# EAGLE board mc (EAGLE 9.6.2)
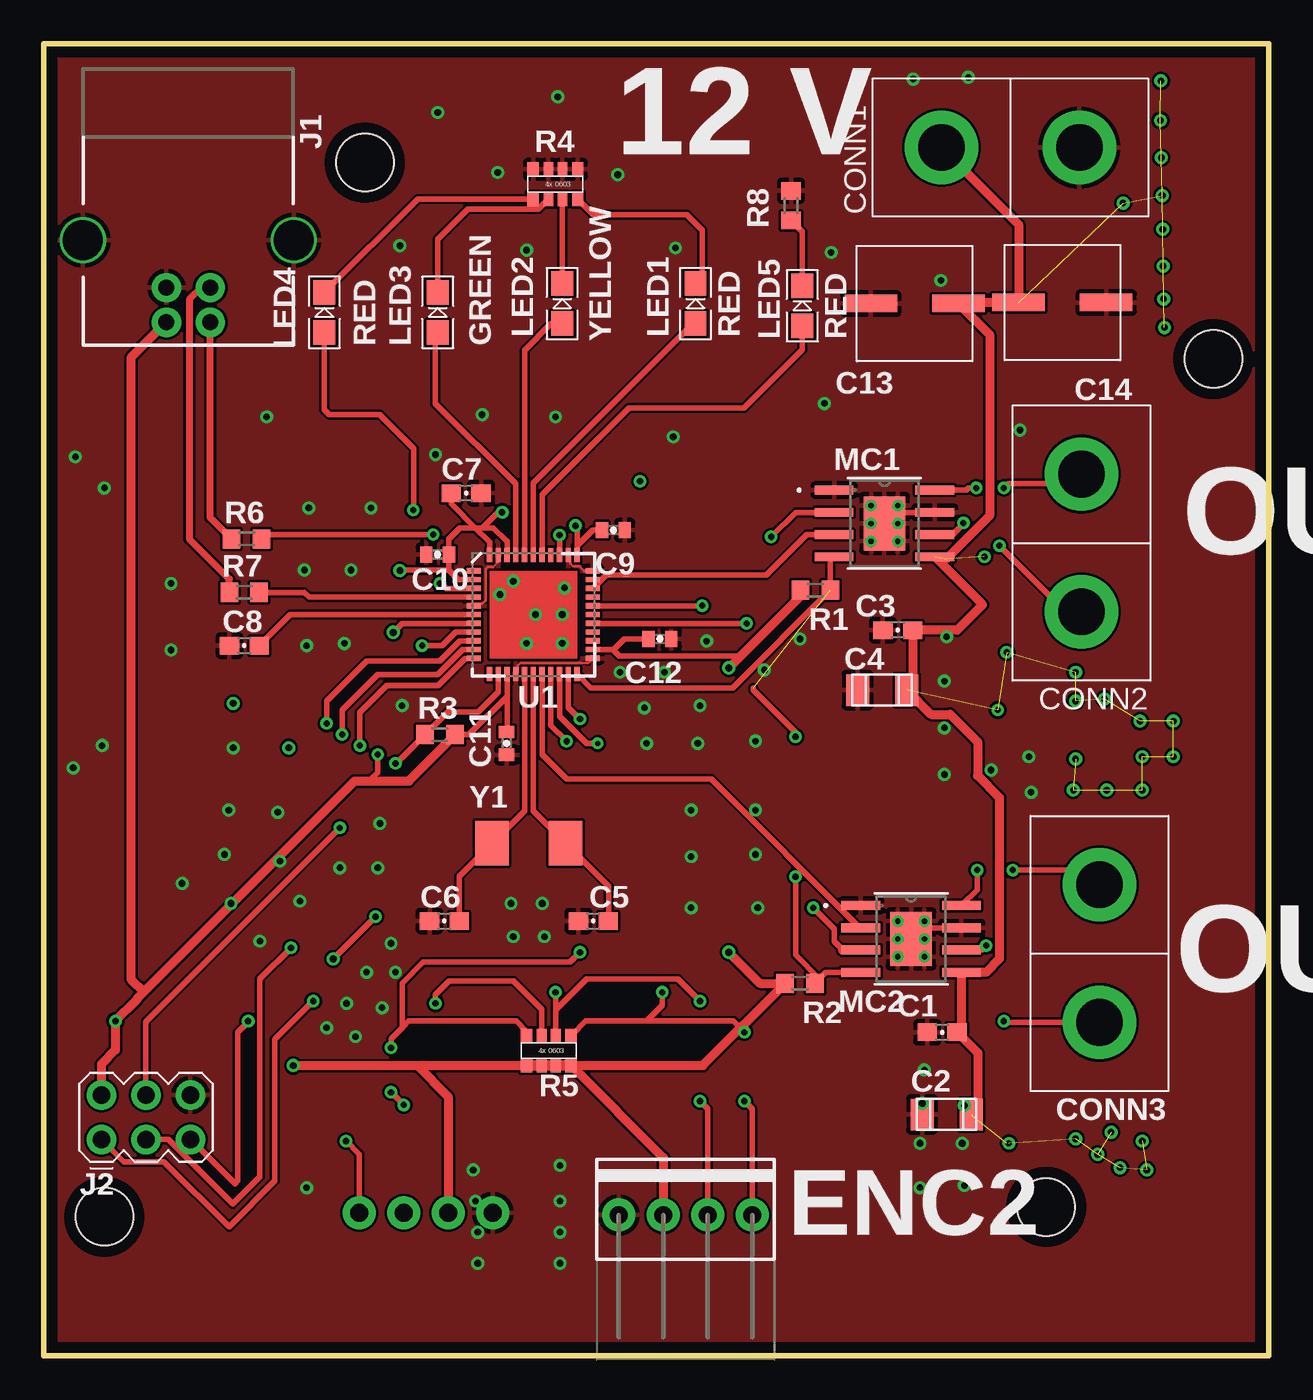
[diagram p0: board, top side]
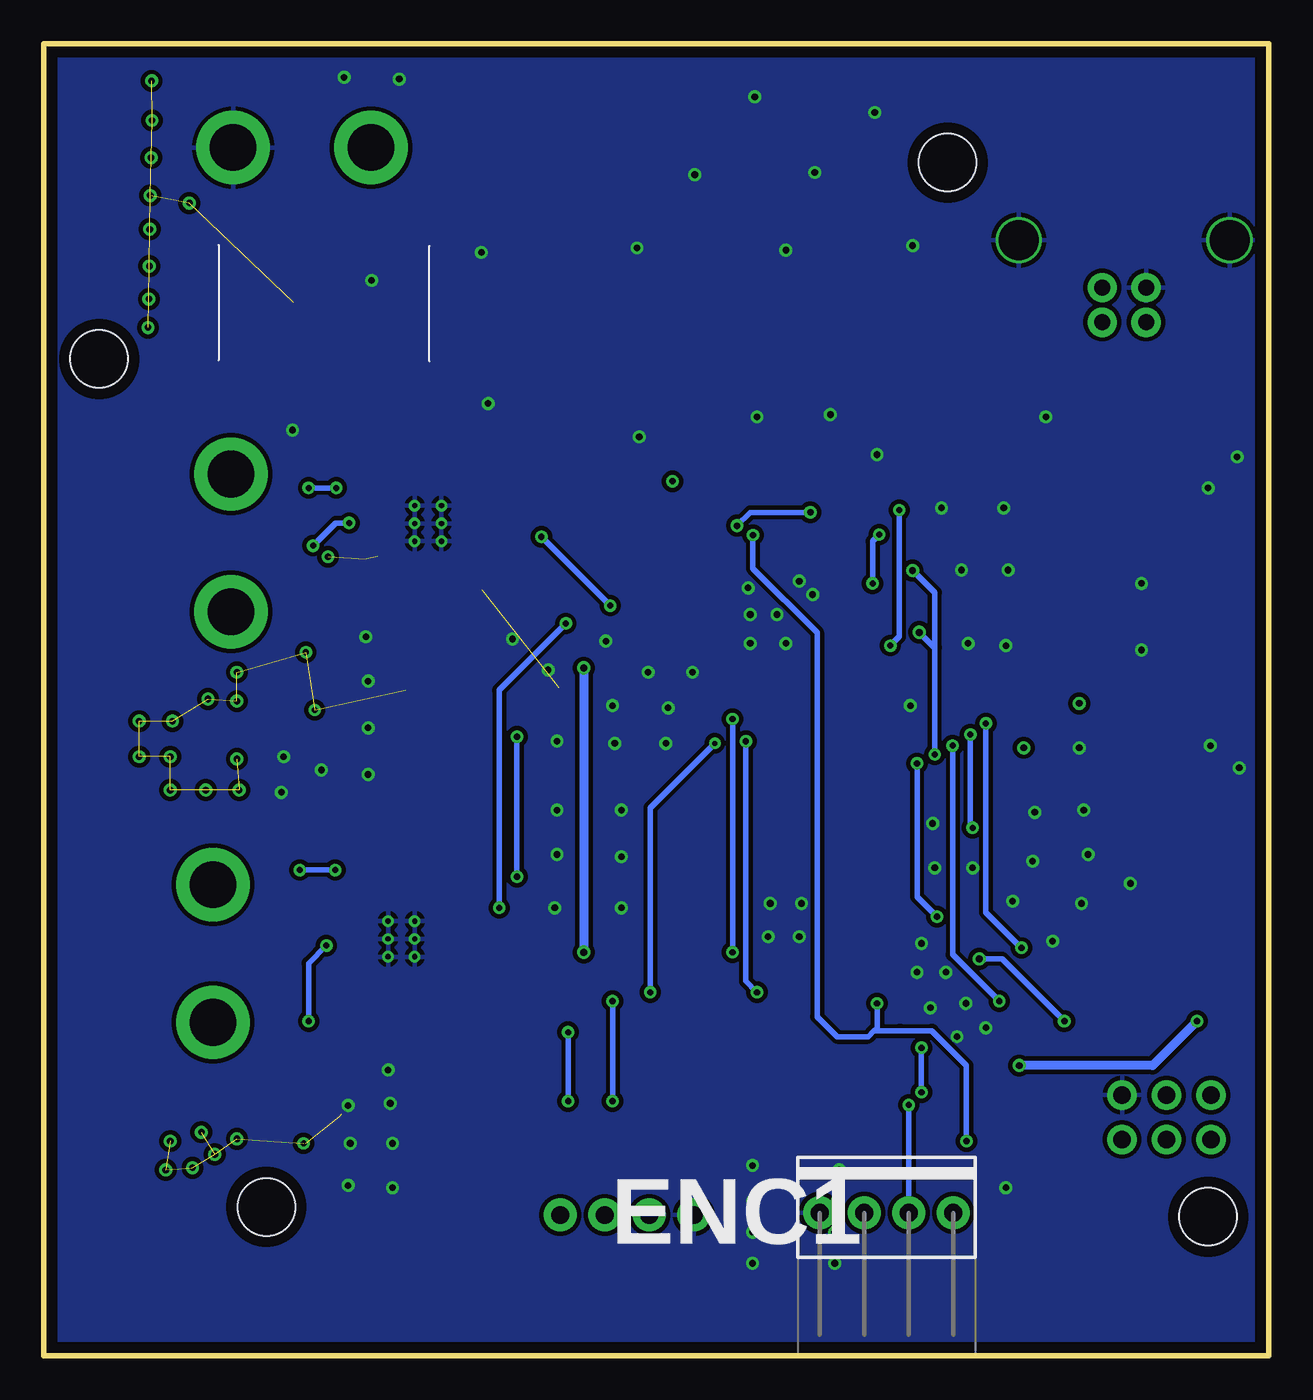
[diagram p1: board, bottom side, seen from below]

Size 70 x 75 mm. Coordinates in mm from the lower left corner, seen from the top.
Outline: 0,0 70,0 70,75 0,75 0,0
Copper layers (1*16): Top 2mil / dielectric 9mil / Bottom 2mil
Design rules "pie_jlc": minimum track width 6mil, minimum drill 0.199896875mm, track to track 6mil, track to pad 6mil, pad to pad 6mil, via to via 6mil, smd to smd 6mil, copper to edge 25mil, drill to drill 7mil, minimum pad ring 7mil, minimum via ring 7mil, stop-mask expansion 3mil, vias tented up to drill 21mil, thermal gap 10mil

## Footprints (pad centres in the part's own frame; a part is rotated, then mirrored left to right if it is on the bottom)
0603-CAP = smd 1.1 x 1: 1 -0.85,0; 2 0.85,0
1206 = smd 1.306 x 1.8: 1 -1.403,0; 2 1.403,0
0402-CAP = smd 0.7 x 0.9: 1 -0.65,0; 2 0.65,0
LELON_CAP = smd 3 x 1: P$1 -2.5,0; P$2 2.5,0
ANDERSON_VERTICAL = drill 2.667 pad 4.191: PIN1 0,-3.937; PIN2 0,3.937
1X04-MTA = drill 1.016 pad 1.88: 1 -3.81,0; 2 -1.27,0; 3 1.27,0; 4 3.81,0
USB-B-PTH = drill 0.914 pad 1.676: D+ 4,1.25; D- 5.981,1.25; GND 4,-1.25; VBUS 5.981,-1.25 | drill 2.286: SHLD1 1.282,-6.02; SHLD2 1.282,6.02
MA03-2 = drill 1 pad 1.676: 1 -2.54,-1.27; 2 -2.54,1.27; 3 0,-1.27; 4 0,1.27; 5 2.54,-1.27; 6 2.54,1.27
LED-0805 = smd 1.397 x 1.245: A -1.143,0; C 1.143,0
DDA0008H_N_TEX = smd 2.21 x 0.508: 1 -2.875,1.905; 2 -2.875,0.635; 3 -2.875,-0.635; 4 -2.875,-1.905; 5 2.875,-1.905; 6 2.875,-0.635; 7 2.875,0.635; 8 2.875,1.905 | smd 2.388 x 3.099: 9 0,0 | drill 0.3: P$1 -0.762,1.016; P$2 0.762,1.016; P$3 -0.762,0; P$4 0.762,0; P$5 -0.762,-1.016; P$6 0.762,-1.016
R0603 = smd 1 x 1.1: 1 -0.85,0; 2 0.85,0
4X-0603 = smd 0.65 x 0.8: 1 0,-0.05; 4 2.55,-0.05; 5 2.55,1.65; 8 0,1.65 | smd 0.55 x 0.8: 2 0.875,-0.05; 3 1.675,-0.05; 6 1.675,1.65; 7 0.875,1.65
QFN-44 = smd 0.8 x 0.3: 1 -3.4,2.5; 2 -3.4,2; 3 -3.4,1.5; 4 -3.4,1; 5 -3.4,0.5; 6 -3.4,0; 7 -3.4,-0.5; 8 -3.4,-1; 9 -3.4,-1.5; 10 -3.4,-2; 11 -3.4,-2.5; 23 3.4,-2.5; 24 3.4,-2; 25 3.4,-1.5; 26 3.4,-1; 27 3.4,-0.5; 28 3.4,0; 29 3.4,0.5; 30 3.4,1; 31 3.4,1.5; 32 3.4,2; 33 3.4,2.5 | smd 0.3 x 0.8: 12 -2.5,-3.4; 13 -2,-3.4; 14 -1.5,-3.4; 15 -1,-3.4; 16 -0.5,-3.4; 17 0,-3.4; 18 0.5,-3.4; 19 1,-3.4; 20 1.5,-3.4; 21 2,-3.4; 22 2.5,-3.4; 34 2.5,3.4; 35 2,3.4; 36 1.5,3.4; 37 1,3.4; 38 0.5,3.4; 39 0,3.4; 40 -0.5,3.4; 41 -1,3.4; 42 -1.5,3.4; 43 -2,3.4; 44 -2.5,3.4
STAND-OFF = hole 3.302: 0,0
CRYSTAL-SMD-5.0X3.2-2PIN = smd 1.905 x 2.54: P$1 -2.095,0; P$2 2.095,0

## Placement (x,y rotation side)
C1  0.1 µF  [0603-CAP]  51.34,18.5 180 top
C2  47 µF  [1206]  51.59,13.8 180 top
C3  0.1 µF  [0603-CAP]  48.8,41.48 180 top
C4  47 µF  [1206]  47.91,38.05 180 top
C5  18pF  [0603-CAP]  31.4,24.84 0 top
C6  18pF  [0603-CAP]  22.89,24.84 0 top
C7  1 uF  [0603-CAP]  24.14,49.31 180 top
C8  1uF  [0603-CAP]  11.46,40.59 0 top
C9  0.1 uF  [0402-CAP]  32.55,47.2 180 top
C10  0.1 uF  [0402-CAP]  22.51,45.8 0 top
C11  0.1 uF  [0402-CAP]  26.45,35.01 90 top
C12  0.1 uF  [0402-CAP]  35.21,40.97 180 top
C13  LELON_ELECTROLYTIC_CAP  [LELON_CAP]  49.77,60.15 180 top
C14  LELON_ELECTROLYTIC_CAP  [LELON_CAP]  58.21,60.2 0 top
CONN1  ANDERSONVERTICAL  [ANDERSON_VERTICAL]  55.24,69.06 90 top
CONN2  ANDERSONVERTICAL  [ANDERSON_VERTICAL]  59.29,46.46 180 top
CONN3  ANDERSONVERTICAL  [ANDERSON_VERTICAL]  60.32,22.99 180 top
ENC1  [1X04-MTA]  21.84,8.18 0 bottom
ENC2  [1X04-MTA]  36.67,8.05 0 top
J1  USB_B_PTH  [USB-B-PTH]  8.26,65.06 270 top
J2  AVR_SPI_PRG_6MA03-2  [MA03-2]  5.84,13.64 0 top
LED1  RED  [LED-0805]  37.24,60.15 90 top
LED2  YELLOW  [LED-0805]  29.62,60.15 90 top
LED3  GREEN  [LED-0805]  22.51,59.64 90 top
LED4  RED  [LED-0805]  16.04,59.64 90 top
LED5  RED  [LED-0805]  43.34,60.02 90 top
MC1  DRV8872DDAR  [DDA0008H_N_TEX]  48.04,47.58 0 top
MC2  DRV8872DDAR  [DDA0008H_N_TEX]  49.56,23.83 0 top
R1  10k  [R0603]  44.1,43.77 0 top
R2  10k  [R0603]  43.21,21.29 0 top
R3  10k  [R0603]  22.64,35.51 180 top
R4  330  [4X-0603]  30.51,67.77 180 top
R5  10k  [4X-0603]  30.13,18.24 180 top
R6  22  [R0603]  11.59,46.69 0 top
R7  22  [R0603]  11.46,43.64 0 top
R8  330  [R0603]  42.7,65.74 90 top
U1  32U4  [QFN-44]  27.97,42.37 0 top
U$1  [STAND-OFF]  3.46,7.95 0 top
U$2  [STAND-OFF]  57.28,8.51 0 top
U$3  [STAND-OFF]  66.83,56.98 0 top
U$4  [STAND-OFF]  18.36,68.2 0 bottom
U$5  [PIE-LOGO]  177.19,22.02 0 top  (outside the outline)
Y1  [CRYSTAL-SMD-5.0X3.2-2PIN]  27.72,29.29 0 top

## Library data of the parts
C1 C3 C5-C12 = pie; PIE-INT-REF-NUM: CAPACITOR-GENERIC
C2 C4 C13 C14 R4 R5 U$1-U$5 Y1 = pie
CONN1-CONN3 = pie; PIE-INT-REF-NUM: Anderson
ENC1 ENC2 = pie; PIE-INT-REF-NUM: MTA
J1 = pie; PROD_ID: CONN-08278; SF_ID: PRT-00139
J2 = pie; PIE-INT-REF-NUM: BULK-STOCK
LED1-LED5 = pie; PIE-INT-REF-NUM: LED
MC1 MC2 = pie; BUILT_BY: Texas_Instrument_Team; MANUFACTURER_PART_NUMBER: DRV8872DDAR; SOURCELIBRARY: TI_2019-01-17; VENDOR: Texas Instruments
R1-R3 R6-R8 = pie; DESCRIPTION: RESISTOR, American symbol; DISTRIBUTOR: DigiKey; MANUFACTURER: Rohm Semiconductor; NOTES: Cut Tape; PACKAGE: R0603
U1 = pie; PROD_ID: IC-10828

## Nets
A1: ENC1.3 R5.4 U1.21
A2: ENC1.4 R5.3 U1.36
AIN1: MC1.3 U1.31
AIN2: MC1.2 U1.29
AOUT1: CONN2.PIN2 MC1.6
AOUT2: CONN2.PIN1 MC1.8
B1: ENC2.3 R5.2 U1.19
B2: ENC2.4 R5.1 U1.20
BIN1: MC2.3 U1.27
BIN2: MC2.2 U1.18
BOUT1: CONN3.PIN2 MC2.6
BOUT2: CONN3.PIN1 MC2.8
D+: J1.D+ R7.1
D-: J1.D- R6.1
FAULT_N: MC1.4 MC2.4 R1.2 R2.2 U1.22
GND: C1.2 C2.2 C3.2 C4.2 C5.1 C6.1 C7.1 C8.1 C9.1 C10.1 C11.1 C12.1 C13.P$2 C14.P$2 CONN1.PIN1 ENC1.1 ENC2.1 J1.GND J1.SHLD1 J1.SHLD2 J2.6 MC1.1 MC1.7 MC1.9 MC1.P$1 MC1.P$2 MC1.P$3 MC1.P$4 MC1.P$5 MC1.P$6 MC2.1 MC2.7 MC2.9 MC2.P$1 MC2.P$2 MC2.P$3 MC2.P$4 MC2.P$5 MC2.P$6 R4.1 R4.2 R4.3 R4.4 R8.2 U1.5 U1.15 U1.23 U1.33 U1.35 U1.43
HEARTBEAT: LED5.A U1.38
LED1: LED1.A U1.39
LED2: LED2.A U1.40
LED3: LED3.A U1.41
LR1: LED1.C R4.8
LR2: LED2.C R4.7
LR3: LED3.C R4.6
LR4: LED4.C R4.5
N$1: C8.2 U1.6
N$3: C5.2 U1.17 Y1.P$2
N$6: R6.2 U1.3
N$9: R7.2 U1.4
N$10: LED5.C R8.1
N$13: C6.2 U1.16 Y1.P$1
RST: J2.5 R3.2 U1.13
RXLED: LED4.A U1.8
SCLK: J2.3 U1.9
SDATI: J2.4 U1.10
SDATO: J2.1 U1.11
VCC: C7.2 C9.2 C10.2 C11.2 C12.2 ENC1.2 ENC2.2 J1.VBUS J2.2 R1.1 R2.1 R3.1 R5.5 R5.6 R5.7 R5.8 U1.2 U1.7 U1.14 U1.24 U1.34 U1.42 U1.44
VM: C1.1 C2.1 C3.1 C4.1 C13.P$1 C14.P$1 CONN1.PIN2 MC1.5 MC2.5

## Tracks (layer width: path | path; a pad name or v marks a point on that pad's centre or on a via)
A1  (via drill 0.35, 0.35 pad 0.33)
  Top 0.305: R5.4 27.58,18.55 27,19.13 20.86,19.13 20.48,18.75 | 20.48,18.75 19.84,18.11 v19.84,17.61 | v19.84,15.07 v20.57,14.34 | U1.21 29.98,37.06 v30.64,36.4 | 20.48,18.75 20.48,21.29 21.7,22.51 30.08,22.51 v30.64,23.07
  Bottom 0.305: v19.84,17.61 v19.84,15.07 | v20.57,14.34 ENC1.3 | v30.64,36.4 v30.64,23.07
A2  (via drill 0.35, 0.35 pad 0.33)
  Top 0.305: R5.3 28.46,19.79 26.83,21.42 23.17,21.42 22.39,20.63 v22.39,20.15 | U1.36 v29.47,46.92 | v17.27,12.27 18.03,11.51 ENC1.4
  Bottom 0.152: 21.08,18.57
  Bottom 0.305: v22.39,20.15 22.39,18.75 22.56,18.57 | v29.47,46.92 29.47,45.01 25.81,41.35 25.81,19.38 24.67,18.24 22.89,18.24 22.56,18.57 | 22.56,18.57 21.08,18.57 19.26,18.57 17.27,16.59 v17.27,12.27
AIN1
  Top 0.305: U1.31 32.13,44.63 41.28,44.63 43.59,46.94 MC1.3
AIN2  (via drill 0.35 pad 0.33)
  Top 0.305: U1.29 v37.62,42.87 v37.62,42.88 | MC1.2 42.96,48.21 v41.56,46.82
  Bottom 0.305: v37.62,42.88 v41.56,46.82
AOUT1  (via drill 0.35)
  Top 0.305: MC1.6 51.94,46.94 52.58,47.58 v52.55,47.61 | v54.61,46.31 58.4,42.52 CONN2.PIN2
  Bottom 0.305: v52.55,47.61 53.31,47.61 v54.61,46.31
AOUT2  (via drill 0.35)
  Top 0.305: MC1.8 52.7,49.48 52.83,49.61 v53.28,49.61 | v54.86,49.61 55.12,49.86 58.93,49.86 59.29,50.23 CONN2.PIN1
  Bottom 0.305: v53.28,49.61 v54.86,49.61
B1  (via drill 0.35 pad 0.33)
  Top 0.305: R5.2 29.26,19.78 | v37.5,20.27 36.23,21.54 31.02,21.54 29.26,19.78 | v37.5,14.56 37.94,14.12 ENC2.3 | U1.19 28.97,36.04 v29.88,35.13 | 29.26,19.78 29.24,19.79 v29.24,20.78
  Bottom 0.305: v37.5,20.27 v37.5,14.56 | v29.88,35.13 29.88,21.42 v29.24,20.78
B2  (via drill 0.3 pad 0.33, 0.35 pad 0.33)
  Top 0.305: R5.1 30.97,19.13 34.45,19.13 | v40.04,18.5 39.4,19.13 34.45,19.13 | v40.04,14.56 40.48,14.12 ENC2.4 | 34.45,19.13 35.34,20.02 v35.34,20.78 | U1.20 29.47,36.55 31.02,35.01 v31.66,35.01
  Bottom 0.305: v40.04,18.5 v40.04,14.56 | v35.34,20.78 35.34,31.32 v31.66,35.01
BIN1  (via drill 0.35 pad 0.33)
  Top 0.305: U1.27 40.16,41.87 v40.16,41.86 | MC2.3 46.23,23.19 46.18,23.19 | v43.98,25.61 45.18,24.41 45.18,23.67 45.65,23.19
  Top 0.508: 45.65,23.19 46.23,23.19
  Bottom 0.305: v40.16,41.86 43.98,38.05 v43.98,25.61
BIN2
  Top 0.305: U1.18 28.47,34.38 29.88,32.97 38.13,32.97 46.64,24.46 MC2.2
BOUT1  (via drill 0.35)
  Top 0.305: MC2.6 53.59,23.19 v53.85,23.45 | v54.86,19.13 54.94,19.06 CONN3.PIN2
  Bottom 0.305: v53.85,23.45 54.86,22.43 v54.86,19.13
BOUT2  (via drill 0.35)
  Top 0.305: MC2.8 53.34,26.64 v53.34,27.77 | v55.37,27.77 59.49,27.77 CONN3.PIN1
  Bottom 0.305: v53.34,27.77 v55.37,27.77
D+
  Top 0.406: J1.D+ 9,61.06 8.33,60.39 8.33,46.69 10.61,44.4 R7.1
D-
  Top 0.406: R6.1 9.51,47.92 J1.D-
FAULT_N  (via drill 0.35 pad 0.33)  (1 unrouted)
  Top 0.305: U1.22 31.26,38.18 39.36,38.18 R1.2 44.95,45.46 MC1.4 | R2.2 44.32,21.55 | 44.32,21.55 44.7,21.92 MC2.4 46.13,21.92 | 40.55,38.18 40.55,38.05 42.96,35.64 v42.96,35.39 | 44.32,21.55 42.96,22.91 v42.96,27.38
  Bottom 0.305: v42.96,35.39 v42.96,27.38
GND  (via drill 0.38 pad 0.33)
  Top 0.152: U1.33 30.87,44.87 30.6,45.14 30.23,45.14 30.09,45.28 30.09,45.65 U1.35 | U1.5 24.69,42.99 25.07,42.99 25.24,43.17 25.24,44.97 25.38,45.1 25.68,45.1 25.97,45.4 U1.43 | U1.23 31.1,39.6 27.23,39.6 27.09,39.46 27.09,39.09 U1.15
  Top 0.305: MC1.9 48.67,48.21 MC1.7 | MC2.9 50.2,24.46 MC2.7
  other vias: 52.61,14.3 52.48,12.14 52.61,9.73 50.07,9.61 50.07,12.14 50.2,14.43 50.33,16.34 56.42,32.21 56.29,34.24 54.13,33.48 51.47,33.23 51.47,35.89 51.47,38.56 51.59,41.1 55.79,52.91 51.26,61.47 52.84,73.08 49.69,72.98 25.94,67.64 29.37,71.96 32.8,67.52 22.51,71.07 20.35,63.45 27.59,63.2 36.1,63.33 44.99,63.07 44.61,54.44 35.97,52.53 29.24,53.67 25.05,53.8 22.39,51.52 12.73,53.67 40.67,35.13 40.67,31.2 40.67,28.66 40.8,25.61 36.99,25.61 36.99,28.53 36.99,31.2 37.37,35.01 34.45,35.01 37.88,40.85 41.18,39.2 43.21,40.97 37.5,37.16 34.32,37.04 26.7,25.86 28.48,25.86 28.61,23.96 26.83,23.96 19.84,23.57 18.45,21.92 17.3,20.15 16.16,18.75 17.81,18.24 19.34,19.89 20.1,21.92 16.92,27.89 19.08,27.89 19.21,30.43 14.64,25.99 12.35,23.7 10.7,25.86 13.49,28.27 13.37,31.07 10.57,31.2 10.32,28.66 7.91,27 10.83,34.75 17.18,40.72 15.02,40.59 20.48,37.16 17.56,44.91 14.89,44.91 18.7,48.47 15.15,48.47 1.68,33.61 1.81,51.39 3.46,49.61 3.33,34.88 15.02,9.61 29.5,10.88 29.5,8.84 29.5,7.06 29.5,5.29 24.8,5.29 24.8,7.06 24.67,8.84 24.54,10.62 7.27,44.15 7.27,40.34 32.93,39.07 35.47,39.07 29.75,43.9 26.83,44.28 26.07,43.51 27.59,40.72 29.62,40.72 29.62,42.37 28.1,42.37
  pour Bottom (isolate 0.254, rank 2): -17.62,117.3 137.83,117.3 137.83,-12.11 -17.62,-12.11
  pour Top: -39.75,128.99 146.3,128.99 146.69,128.6 146.69,-19.48 -35.69,-19.48 -38.23,-22.02 -38.23,127.46
HEARTBEAT
  Top 0.305: U1.38 28.47,49.22 33.43,54.18 40.01,54.18 43.34,57.51 LED5.A
LED1
  Top 0.305: U1.39 27.97,49.89 37.09,59.01 LED1.A
LED2
  Top 0.305: U1.40 27.47,57.5 28.98,59.01 LED2.A
LED3
  Top 0.305: U1.41 26.97,49.85 22.39,54.44 22.39,58.37 LED3.A
LR1
  Top 0.305: R4.8 31.4,65.23 36.74,65.23 37.62,64.34 37.62,61.67 LED1.C
LR2
  Top 0.305: R4.7 29.62,66.11 LED2.C
LR3
  Top 0.305: LED3.C 22.51,63.83 24.22,65.54 28.26,65.54 R4.6
LR4
  Top 0.305: LED4.C 21.37,66.12 R4.5
N$1
  Top 0.305: C8.2 14.09,42.37 U1.6
N$2  (via drill 0.35)
  other vias: 34.07,49.99
N$3
  Top 0.305: U1.17 27.97,31.13 Y1.P$2 32.27,26.83 32.27,24.86 C5.2
N$6  (via drill 0.35 pad 0.33)
  Top 0.305: v22.26,46.94 12.69,46.94 R6.2 | U1.3 22.99,43.87 22.71,44.15 v22.64,44.15
  Bottom 0.305: v22.26,46.94 22.64,46.56 v22.64,44.15
N$9
  Top 0.305: R7.2 14.89,43.64 15.16,43.37 U1.4
N$10
  Top 0.305: LED5.C 43.34,64.25 R8.1
N$13
  Top 0.305: U1.16 27.47,31.14 Y1.P$1 23.74,27.41 C6.2
N$161  (via drill 0.38 pad 0.33)
  other vias: 14,34.75
N$163  (via drill 0.38 pad 0.33)
  other vias: 10.83,37.29
RST  (via drill 0.35 pad 0.33, 0.38 pad 0.33)
  Top 0.305: U1.13 25.97,37.95 24.83,36.81 23.09,36.81 R3.2 20.14,33.86 v20.1,33.86 | v11.68,19.13 11.68,19.09 11.08,18.5 11.08,9.99 10.93,9.83 8.4,12.37 J2.5 | v16.54,22.69 v18.96,25.1
  Bottom 0.305: v18.96,25.1 20.1,26.24 v20.1,33.86 | v11.68,19.13 15.23,22.69 v16.54,22.69
RXLED  (via drill 0.35 pad 0.33)
  Top 0.305: v21.11,48.34 21.11,48.59 21.14,48.62 21.14,51.87 19.21,53.8 16.31,53.8 16.04,54.08 LED4.A | v21.62,40.59 22.77,40.59 23.54,41.37 U1.8
  Bottom 0.305: v21.62,40.59 21.11,41.1 v21.11,48.34
SCLK  (via drill 0.35 pad 0.33)
  Top 0.305: U1.9 24.55,40.85 23.78,40.85 22.64,39.7 18.45,39.7 16.16,37.42 v16.16,36.15 | v14.13,23.32 12.35,21.54 12.35,10.24 10.79,8.68 7.11,12.37 J2.3
  Bottom 0.305: v16.16,36.15 16.16,25.35 v14.13,23.32
SDATI  (via drill 0.35 pad 0.33)
  Top 0.305: U1.10 23.95,40.37 22.52,38.94 19.08,38.94 17.05,36.91 v17.05,35.51 | v16.92,30.18 5.84,19.1 J2.4
  Bottom 0.305: v17.05,35.51 17.05,30.31 v16.92,30.18
SDATO  (via drill 0.35 pad 0.33)
  Top 0.152: 13.24,18.11 13.21,18.08
  Top 0.305: U1.11 24.1,39.87 22.54,38.31 19.6,38.31 18.07,36.77 v18.07,34.88 | v15.4,20.27 13.24,18.11 | 13.21,18.08 13.21,9.99 10.59,7.37 6.86,11.1 4.57,11.1 J2.1
  Bottom 0.305: v18.07,34.88 18.07,22.94 v15.4,20.27
VCC  (via drill 0.35 pad 0.33, 0.38 pad 0.33, 0.4 pad 0.33)
  Top 0.254: U1.7
  Top 0.305: R3.1 24.29,35.51 26.47,37.7 | 26.47,37.7 U1.14 | v19.97,41.35 20.48,41.86 U1.7 | v19.08,34.37 19.08,33.35 18.57,32.85 | U1.2 23.69,44.37 23.15,44.91 | 39.82,39.99 32.9,39.99 32.52,40.37 | U1.24 32.52,40.37 | U1.42 26.47,46.56 26.45,46.56 25.69,47.32 25.05,47.32 | 25.05,47.32 24.67,47.32 | 24.67,47.32 23.78,47.32 23.15,46.69 23.15,45.81 C10.2 23.15,45.78 23.15,44.91 | 24.67,47.32 25.47,46.52 U1.44 | 25.05,47.32 25.94,48.21 v26.2,48.21 | v30.39,47.45 30.47,47.36 30.47,46.31 | 30.47,46.31 U1.34 | 23.15,44.91 20.35,44.91 v20.35,44.89 | 30.47,46.31 31.36,47.2 C9.2 | 26.47,37.7 26.47,35.68 C11.2 | 32.52,40.37 32.58,40.37 33.18,40.97 C12.2 | C7.2 23.29,48.71 24.67,47.32
  Top 0.508: 21.34,16.59 15.65,16.59 v14.26,16.59 | 21.34,16.59 R5.5 | ENC2.2 35.4,11.32 R5.8 37.66,16.59 R2.1 40.93,21.29 v39.15,23.07 | R1.1 43.25,43.43 39.82,39.99 v39.15,39.32 | R3.1 23.49,35.47 20.86,32.85 18.57,32.85 17.76,32.85 5.71,20.79 | J2.2 3.3,16.68 4.1,17.48 v4.1,19.13 5.32,20.35 5.32,20.4 5.71,20.79 | J1.VBUS 4.98,57.05 4.98,21.52 5.71,20.79 | 21.34,16.59 23.11,14.81 ENC1.2
  Top 0.61: R5.5 R5.6 R5.7 R5.8
  Bottom 0.305: v19.97,41.35 19.08,40.47 | v19.08,34.37 19.08,40.47 | 19.08,40.47 19.08,43.62 v20.35,44.89 | v26.2,48.21 29.62,48.21 v30.39,47.45
  Bottom 0.508: v39.15,39.32 v39.15,23.07 | v4.1,19.13 6.64,16.59 v14.26,16.59
VM  (via drill 0.35 pad 0.33, 0.38 pad 0.33)  (32 unrouted)
  Top 0.508: C1.1 52.45,18.24 | 55.02,12.14 v55.15,12.14 | CONN1.PIN2 55.71,64.66 C14.P$1 52.32,60.2 C13.P$1 54.04,58.37 54.04,48.03 51.56,45.55 | MC1.5 53.65,42.94 52.19,41.48 C3.1 49.65,38.39 C4.1 50.7,36.67 51.79,36.67 53.36,35.1 53.36,33.16 54.61,31.91 54.61,22.69 53.85,21.92 MC2.5 52.44,18.74 C1.1 | C1.1 53.39,17.3 53.39,13.98 53.1,13.7
  other vias: 53.75,45.67 55.02,40.21 54.52,36.91 58.96,12.4 60.99,12.78 62.77,12.27 63.02,10.62 61.5,10.75 60.23,11.51 63.84,72.88 63.81,70.62 63.86,68.48 63.96,62.28 63.99,60.41 62.77,32.34 60.74,32.34 58.83,32.34 58.96,34.12 62.77,34.24 64.55,34.24 64.55,36.27 62.64,36.27 60.61,37.55 58.96,39.07 58.96,37.42 61.68,65.89 63.91,66.32 63.94,64.39 64.04,58.78

## Text on the board
tPlace: 12 V | OUT1 | OUT2